# Altium PCB ScannerV2.PcbDoc
Units mm, origin at the board's own origin, x right, y up, seen from the top; angles counter-clockwise.
Board outline 40 x 92 mm, 2 copper layers (Top Layer, Bottom Layer); 63 components, 44 nets, 218 pads, 222 vias.
Unrouted connection lines stored in the file: 22.
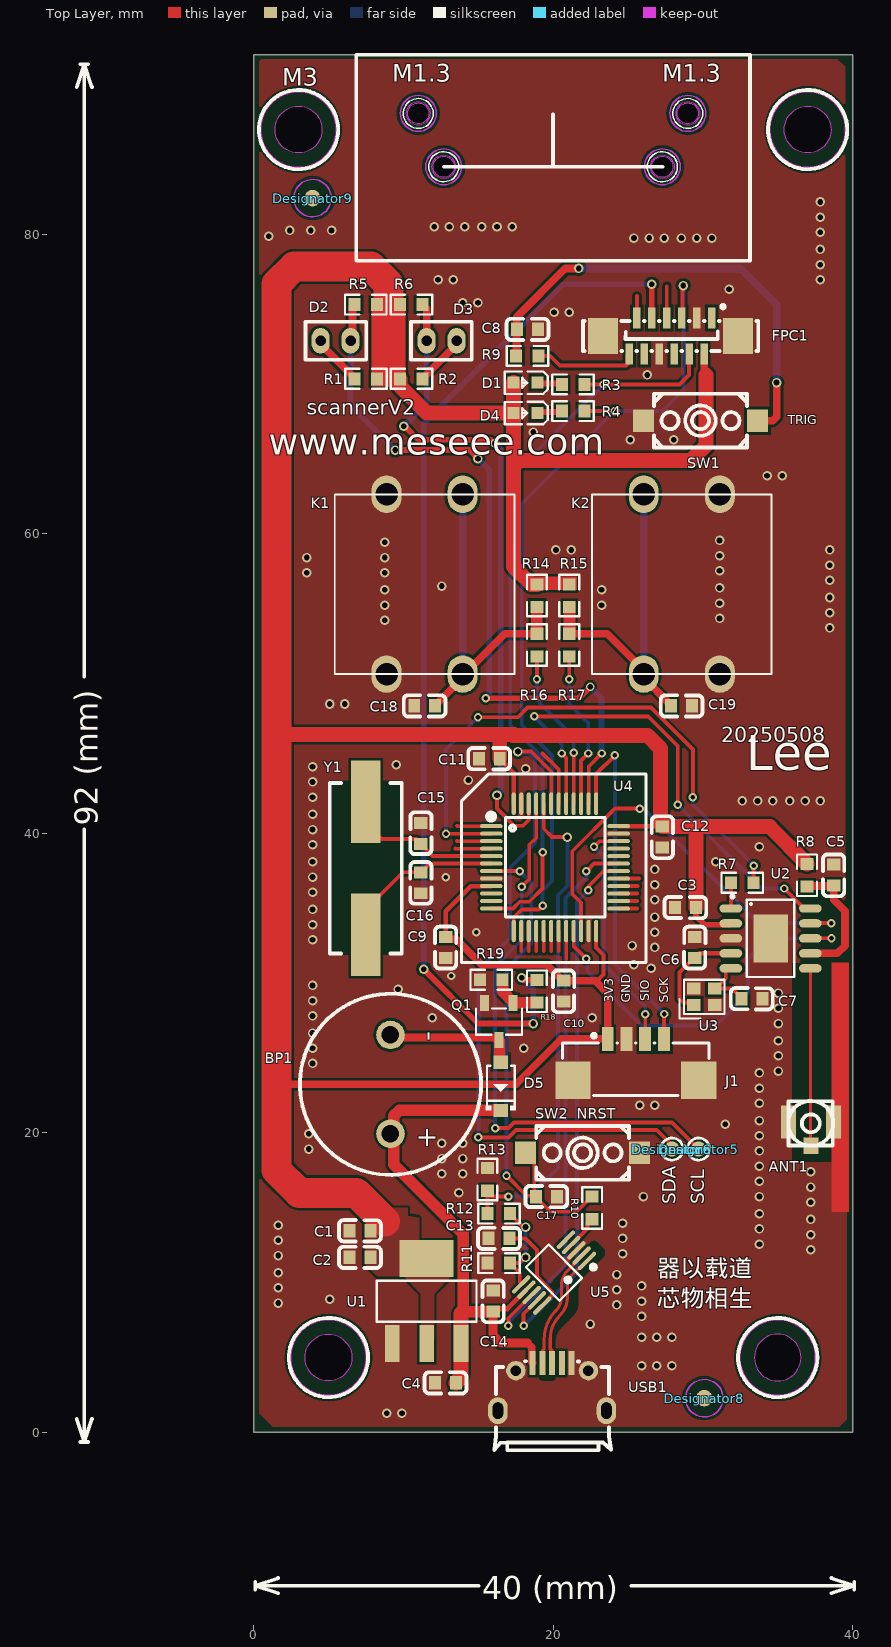
[diagram p0: Top Layer view]
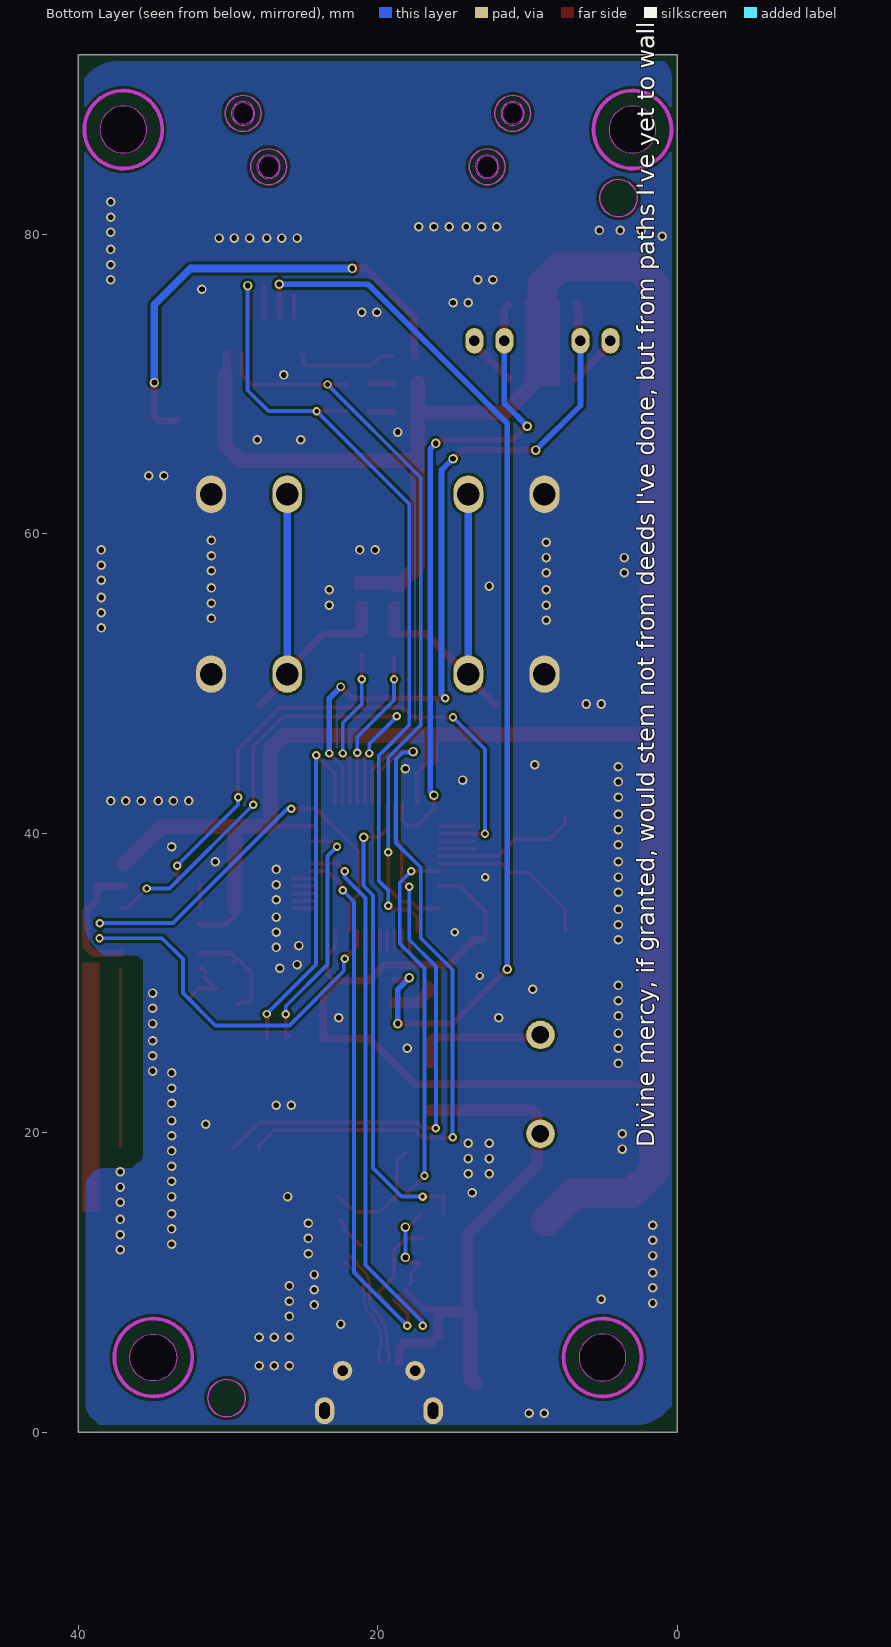
[diagram p1: Bottom Layer view, seen from below]

## Layer stack, top to bottom
Top Solder: solder mask 0.0102, Solder Resist, Dk 3.5
Top Layer: signal copper 0.0356
Dielectric 1: dielectric 0.32, FR-4, Dk 4.8
Bottom Layer: signal copper 0.0356
Bottom Solder: solder mask 0.0102, Solder Resist, Dk 3.5

## Board outline
0,0 0,92 40,92 40,0
cut-out: 33.44,5 ccw(c35,5) 35,3.44 ccw(c35,5) 36.56,5 ccw(c35,5) 35,6.56 ccw(c35,5)
cut-out: 5,3.44 cw(c5,5) 3.44,5 cw(c5,5) 5,6.56 cw(c5,5) 6.56,5 cw(c5,5)
cut-out: 37,85.44 cw(c37,87) 35.44,87 cw(c37,87) 37,88.56 cw(c37,87) 38.56,87 cw(c37,87)
cut-out: 29,87.287 cw(c29,88.077) 28.21,88.077 cw(c29,88.077) 29,88.867 cw(c29,88.077) 29.79,88.077 cw(c29,88.077)
cut-out: 27.3,83.726 cw(c27.3,84.516) 26.51,84.516 cw(c27.3,84.516) 27.3,85.306 cw(c27.3,84.516) 28.09,84.516 cw(c27.3,84.516)
cut-out: 12.7,83.726 cw(c12.7,84.516) 11.91,84.516 cw(c12.7,84.516) 12.7,85.306 cw(c12.7,84.516) 13.49,84.516 cw(c12.7,84.516)
cut-out: 11,87.287 cw(c11,88.077) 10.21,88.077 cw(c11,88.077) 11,88.867 cw(c11,88.077) 11.79,88.077 cw(c11,88.077)
cut-out: 12.7,83.811 cw(c12.7,84.516) 11.995,84.516 cw(c12.7,84.516) 12.7,85.221 cw(c12.7,84.516) 13.405,84.516 cw(c12.7,84.516)
cut-out: 27.3,83.811 cw(c27.3,84.516) 26.595,84.516 cw(c27.3,84.516) 27.3,85.221 cw(c27.3,84.516) 28.005,84.516 cw(c27.3,84.516)
cut-out: 29,87.372 cw(c29,88.077) 28.295,88.077 cw(c29,88.077) 29,88.782 cw(c29,88.077) 29.705,88.077 cw(c29,88.077)
cut-out: 11,87.372 cw(c11,88.077) 10.295,88.077 cw(c11,88.077) 11,88.782 cw(c11,88.077) 11.705,88.077 cw(c11,88.077)
cut-out: 37,85.44 cw(c37,87) 35.44,87 cw(c37,87) 37,88.56 cw(c37,87) 38.56,87 cw(c37,87)
cut-out: 3,85.44 cw(c3,87) 1.44,87 cw(c3,87) 3,88.56 cw(c3,87) 4.56,87 cw(c3,87)
cut-out: 11,88.077

## Design rules (kind name [scope] priority, off if disabled: settings)
Clearance [All] p1: gap=0.178 ignorepadtopadclearanceinfootprint=FALSE
DiffPairsRouting DiffPair_USBDiffPairsRouting [InDifferentialPair ('USB1')] p1: maxlimit=0.254 minlimit=0.152 mostfreqgap=0.203 toplayer_minwidth=0.178 toplayer_maxwidth=0.381 toplayer_prefwidth=0.203 bottomlayer_minwidth=0.178 bottomlayer_maxwidth=0.381 bottomlayer_prefwidth=0.203 maxuncoupledlength=12.7
DiffPairsRouting [All] p2: maxlimit=0.203 minlimit=0.203 mostfreqgap=0.203 toplayer_minwidth=0.178 toplayer_maxwidth=0.254 toplayer_prefwidth=0.178 bottomlayer_minwidth=0.178 bottomlayer_maxwidth=0.254 bottomlayer_prefwidth=0.178 maxuncoupledlength=12.7
MatchedLengths DiffPair_USBMatchedLengths [InDifferentialPair ('USB1')] p1: tolerance=0.254 checknetsindiffpair=FALSE checkdiffpairvsdiffpair=TRUE checkxsignals=TRUE checkothers=TRUE usedelayunits=FALSE
PlaneClearance PlaneClearance_2 [All] p1: clearance=0.508
PlaneClearance PlaneClearance_1 [InNet('UD-')] p2: clearance=1.016
PlaneClearance [InNet('UD+')] p3: clearance=1.016
PlaneConnect [All] p1: planeconnectstyle=Direct reliefexpansion=0.508 reliefentries=4 reliefconductorwidth=0.254 reliefairgap=0.254
PolygonConnect [All] p1: connectstyle=Direct reliefconductorwidth=0.254 reliefentries=4 polygonreliefangle="90 Angle" airgapwidth=0.254
RoutingVias [All] p1: holewidth=0.711 width=1.27 viastyle="Through Hole" minholewidth=0.711 minwidth=1.27 maxholewidth=0.711 maxwidth=1.27
SolderMaskExpansion [All] p1: expansion=0.102
Width [All] p1: maxlimit=3 minlimit=0.19 preferedwidth=0.254 minimp=50.000000 maximp=50.000000 favimp=50.000000
27 further rules are at their usual default settings.

## Classes and differential pairs
component class ScannerV2: ANT1 BP1 C1 C2 C3 C4 C5 C6 C7 C8 C9 C10 C11 C12 C13 C14 C15 C16 C17 C18 C19 D1 D2 D3 D4 D5 FPC1 J1 K1 K2 Q1 R1 R2 R3 R4 R5 R6 R7 R8 R9 R10 R11 R12 R13 R14 R15 R16 R17 R18 R19 SW1 SW2 U1 U2 U3 U4 U5 USB1 Y1

## Components (designator, comment, footprint, x,y, rotation, side; value= is the part's Value field where it differs from the comment)
ANT1 "ANT" IPX-2.0 37.211,19.939 r270 top
BP1 "Beep" BEEP 9.144,23.241 r270 top
C1 "106,0603" C0603 7.112,13.462 r0 top value=104
C2 "104,0603" C0603 7.112,11.684 r0 top value=104
C3 "2.2uF,0603" C0603 28.829,35.052 r180 top value=104
C4 "106,0603" C0603 12.827,3.302 r0 top value=104
C5 "2.2uF,0603" C0603 38.735,37.211 r90 top value=104
C6 "12pF?,0603" C0603 29.464,32.385 r90 top value=104
C7 "12pF?,0603" C0603 33.274,28.956 r0 top value=104
C8 "104,0603" C0603 18.288,73.66 r180 top value=104
C9 "104,0603" C0603 12.827,32.385 r90 top value=104
C10 "104,0603" C0603 20.701,29.464 r90 top value=104
C11 "104,0603" C0603 15.739,44.987 r0 top value=104
C12 "104,0603" C0603 27.305,39.751 r90 top value=104
C13 "104,0603" C0603 16.383,12.954 r180 top value=104
C14 "104,0603" C0603 16.002,8.763 r90 top value=104
C15 "22pF,0603" C0603 11.176,40.005 r270 top value=104
C16 "22pF,0603" C0603 11.176,36.703 r90 top value=104
C17 "104,0603" C0603 19.558,15.748 r0 top value=104
C18 "104,0603" C0603 11.43,48.514 r0 top value=104
C19 "104,0603" C0603 28.575,48.514 r180 top value=104
D1 "LED,0603" LED0603 18.161,70.104 r180 top
D2 "LED" LED-2.5mm 4.477,72.898 r0 top
D3 "LED" LED-2.5mm 13.557,72.898 r180 top
D4 "LED,0603" LED0603 18.161,68.072 r180 top
D5 "1N4148" 1N4148 16.51,23.114 r270 top
Designator5 "Comment" TP_PWR 29.718,18.923 r90 top
Designator6 "Comment" TP_PWR 27.94,18.923 r90 top
Designator8 "Comment" MARK-Point 30.099,2.286 r90 top
Designator9 "Comment" MARK-Point 3.937,82.423 r90 top
FPC1 "AFC01-S12FCA-00" CONN-SMD-12P_AFC11-S12ICA-00 27.847,73.222 r180 top
J1 "Conn_1.25mm_4Pin_PLT" CONN-SMD_4P-P1.25_HCTL_HC-1.25-4PLT 25.527,24.892 r0 top
K1 "TS665CJ" KEY12*12 11.422,56.642 r180 top
K2 "TS665CJ" KEY12*12 28.594,56.642 r0 top
Q1 "S8050" S8050 16.383,27.432 r90 top
R1 "1K,0603" R0603 7.502,70.358 r0 top
R2 "1K,0603" R0603 10.541,70.358 r180 top
R3 "0?,0603" R0603 21.336,69.977 r0 top
R4 "0?,0603" R0603 21.336,68.199 r0 top
R5 "10K,0603" R0603 7.493,75.311 r0 top
R6 "10K,0603" R0603 10.541,75.311 r180 top
R7 "0?,0603" R0603 32.639,36.703 r0 top
R8 "0?,0603" R0603 36.957,37.211 r90 top
R9 "0?,0603" R0603 18.288,71.882 r0 top
R10 "0?,0603" R0603 22.606,14.986 r90 top
R11 "4k7,0603" R0603 16.383,11.303 r180 top
R12 "0?,0603" R0603 16.383,14.605 r0 top
R13 "1K?,0603" R0603 15.621,16.891 r90 top
R14 "10K,0603" R0603 18.923,55.88 r90 top
R15 "10K,0603" R0603 21.082,55.88 r90 top
R16 "100R,0603" R0603 18.923,52.578 r90 top
R17 "100R,0603" R0603 21.082,52.578 r90 top
R18 "1K,0603" R0603 18.923,29.464 r270 top
R19 "10K,0603" R0603 15.875,30.226 r180 top
SW1 "K2-1107ST-A4DW-06" KEY-SMD_L6.2-W3.6-LS8.0 29.845,67.564 r180 top
SW2 "K2-1107ST-A4DW-06" KEY-SMD_L6.2-W3.6-LS8.0 21.971,18.669 r180 top
U1 "AMS1117-3.3" AMS1117 11.557,8.763 r270 top
U2 "CH9141K" CH9141K 34.527,33.109 r270 top
U3 "32MHz" 32MHz_2016 30.099,29.083 r0 top value=32kHz
U4 "STM32F103C8T6" LQFP-48_L7.0-W7.0-P0.50-LS9.0-BL 20.125,37.731 r270 top
U5 "CH340X" CH340X 20.066,10.668 r135 top
USB1 "USB-5PIN" MICRO-USB-SMD_MICROXNJ 19.939,3.048 r0 top
Y1 "8MHz" 8MHz 7.493,37.673 r270 top

## Footprints (in the part's own frame and the unit in brackets; to place one, negate y for a bottom-side part, rotate by r counter-clockwise, add the part's x,y. Pads: shape width x height; smd on the part's side, far side on the other; paste and mask are expansions set on the pad)
1N4148 [mm]
  rect 0.88x0.96 smd: 1(1.61,0) 2(-1.61,0)
  silkscreen extent -1.38,-1 1.6,1
8MHz [mm] "with Master"
  rect 5.5x2 smd: 1(-4.45,0) 2(4.45,0)
  silkscreen extent -5.7,-2.4 5.7,2.4
32MHz_2016 [mm]
  rect 0.9x0.8 smd: 1(-0.7,-0.55) 2(0.7,-0.55) 3(0.7,0.55) 4(-0.7,0.55)
  silkscreen extent -1.65,-1.45 1.35,1.15
AMS1117 [mm] "SOT-223-4_L6.5-W3.5-P2.30-LS7.0-BR"
  rect 2.47x0.98 smd: 1(2.835,-2.3) 2(2.835,0) 3(2.835,2.3)
  rect 2.47x3.6 smd: 4(-2.835,0)
  silkscreen extent -1.37,-3.33 1.37,3.33
BEEP [mm]
  round 1.905 hole 1.168: 1(3.3,0) 2(-3.3,0)
  silkscreen extent -6.05,-6.05 6.05,6.05
C0603 [mm]
  rect 0.8x0.9 smd: 1(-0.7,0) 2(0.7,0)
  silkscreen extent -1.41,-0.71 1.39,0.72
CH340X [mm]
  oval 0.28x1.62 smd: 1(-1,-2.11) 2(-0.5,-2.11) 3(0,-2.11) 4(0.5,-2.11) 5(1,-2.11) 6(1,2.11) 7(0.5,2.11) 8(0,2.11) 9(-0.5,2.11) 10(-1,2.11)
  silkscreen extent -1.74,-2.26 1.58,1.07
CH9141K [mm] "SOP-10"
  oval 0.56x1.515 smd paste+0 mask+0.051: 1(-1.879,-2.65) 2(-0.879,-2.65) 3(0.121,-2.65) 4(1.121,-2.65) 5(2.121,-2.65) 6(2.121,2.65) 7(1.121,2.65) 8(0.121,2.65) 9(-0.879,2.65) 10(-1.879,2.65)
  rect 3.2x2.3 smd paste+0 mask+0.051: 11(0.121,0)
  silkscreen extent -2.77,-2.64 2.7,1.59
CONN-SMD-12P_AFC11-S12ICA-00 [mm]
  rect 0.5x1.4 smd: 1(-2.75,-1.2) 2(-2.25,1.2) 3(-1.75,-1.2) 4(-1.25,1.2) 5(-0.75,-1.2) 6(-0.25,1.2) 7(0.25,-1.2) 8(0.75,1.2) 9(1.25,-1.2) 10(1.75,1.2) 11(2.25,-1.2) 12(2.75,1.2)
  rect 2x2.4 smd: 13(4.5,0) 14(-4.5,0)
  silkscreen extent -5.85,-2.07 5.85,1
CONN-SMD_4P-P1.25_HCTL_HC-1.25-4PLT [mm]
  rect 0.8x1.62 smd paste+0 mask+0.05: 1(-1.875,1.38) 2(-0.625,1.38) 3(0.625,1.38) 4(1.875,1.38)
  rect 2.35x2.5 smd paste+0 mask+0.05: 5(-4.2,-1.38) 6(4.2,-1.38)
  silkscreen extent -4.9,-2.4 4.9,1.73
IPX-2.0 [mm]
  rect 1.1x1 smd: 1(0.8,0)
  rect 2.2x1 smd: 2(-0.8,1.5) 3(-0.8,-1.5)
  silkscreen extent -2.2,-1.5 0.8,1.5
KEY12*12 [mm]
  oval 2x2.5 hole 1.5: 1(-2.54,6) 1(-2.54,-6) 2(2.54,6) 2(2.54,-6)
  silkscreen extent -6,-6 6,6
KEY-SMD_L6.2-W3.6-LS8.0 [mm]
  rect 1.4x1.5 smd: 1(-3.8,0) 2(3.8,0)
  silkscreen extent -3.1,-1.8 3.1,1.8
LED0603 [mm]
  rect 0.8x0.8 smd: 1(0.799,0) 2(-0.799,0)
  silkscreen extent -1.49,-0.75 1.39,0.76
LED-2.5mm [mm]
  oval 1.2x1.7 hole 0.7: 1(0,0) 2(2,0)
  silkscreen extent -1.02,-1.27 3.05,1.27
LQFP-48_L7.0-W7.0-P0.50-LS9.0-BL [mm]
  oval 0.27x1.5 smd paste+0 mask+0.05: 1(-2.75,-4.25) 2(-2.25,-4.25) 3(-1.75,-4.25) 4(-1.25,-4.25) 5(-0.75,-4.25) 6(-0.25,-4.25) 7(0.25,-4.25) 8(0.75,-4.25) 9(1.25,-4.25) 10(1.75,-4.25) 11(2.25,-4.25) 12(2.75,-4.25) 25(2.75,4.25) 26(2.25,4.25) 27(1.75,4.25) 28(1.25,4.25) 29(0.75,4.25) 30(0.25,4.25) 31(-0.25,4.25) 32(-0.75,4.25) 33(-1.25,4.25) 34(-1.75,4.25) 35(-2.25,4.25) 36(-2.75,4.25)
  oval 1.5x0.27 smd paste+0 mask+0.05: 13(4.25,-2.75) 14(4.25,-2.25) 15(4.25,-1.75) 16(4.25,-1.25) 17(4.25,-0.75) 18(4.25,-0.25) 19(4.25,0.25) 20(4.25,0.75) 21(4.25,1.25) 22(4.25,1.75) 23(4.25,2.25) 24(4.25,2.75) 37(-4.25,2.75) 38(-4.25,2.25) 39(-4.25,1.75) 40(-4.25,1.25) 41(-4.25,0.75) 42(-4.25,0.25) 43(-4.25,-0.25) 44(-4.25,-0.75) 45(-4.25,-1.25) 46(-4.25,-1.75) 47(-4.25,-2.25) 48(-4.25,-2.75)
  silkscreen extent -6.22,-6.22 6.35,6.1
MARK-Point [mm]
  round 1.1 smd: 1(0,0)
  Keep-Out Layer circle w0.1: c0,0 r1.25
MICRO-USB-SMD_MICROXNJ [mm] "withPWR"
  rect 0.4x1.6 smd paste-100 mask+0.051: 1(-1.3,1.596) 2(-0.65,1.596) 3(0,1.596) 4(0.65,1.596) 5(1.3,1.596)
  round 1.3 hole 0.7: 6(2.425,1.074) 9(-2.425,1.074)
  oval 1.3x1.8 hole 0.7 slot 1.1 at 90 deg: 7(3.625,-1.596) 8(-3.625,-1.596)
  silkscreen extent -3.87,-4.24 3.93,1.71
R0603 [mm]
  rect 0.806x0.864 smd paste-100 mask+0.051: 1(-0.753,0) 2(0.753,0)
  silkscreen extent -1.39,-0.66 1.39,0.66
S8050 [mm] "NPN"
  rect 1.07x0.6 smd: 1(1.235,-0.95) 2(1.235,0.95) 3(-1.235,0)
  silkscreen extent -0.88,-1.54 0.88,1.54
TP_PWR [mil] "TP_PWR"
  round 40 smd paste+0: 1(0,0)
  silkscreen extent -29,-29 29,29

## Part data
ANT1: library part ANT_IPX
C1 C2 C3 C4 C5 C6 C7 C8 C9 C10 C11 C12 C13 C14 C15 C16 C17 C18 C19: library part Cap2, "105,0603", LatestRevisionDate=17-Jul-2002, LatestRevisionNote="Re-released for DXP Platform.", Published=8-Jun-2000, Publisher="Altium Limited"
D1 D4: library part LED0603
D5: "SOD-123"
FPC1: library part FPC-12Pin_0.5, JLCPCB Part Class="Extended Part", LCSC Part Name="间距:0.5mm P数:12P 翻盖", Manufacturer=JS(钜硕电, Add into BOM=yes, Contact Type=ÏÂ½, Convert to PCB=yes, Datasheet=https://atta.szlcsc.com/upload/public/pdf/source/20190816/C413942_2A72D1AC756EAE17EEDF756A339D4500.pdf, Device=AFC01-S12FCA-00, FFC, FCB Thickness=0.3mm, Height Above Board=2mm, Locking Feature=翻盖, Manufacturer Part=AFC01-S12FCA-00, Mounting Type=ÎÔÌ, Number of Contacts=12P, Pitch=0.5mm, Supplier=LCSC, Supplier Footprint=SMD,P=0.5mm,ÎÔÌ, Supplier Part=C262661, Symbol=AFC01-S12FCA-00
J1: "SWD_Conn"
K1 K2: "矩阵按键"
R1 R2 R3 R4 R5 R6 R7 R8 R9 R10 R11 R12 R13 R14 R15 R16 R17 R18 R19: library part Res2, "0603", LatestRevisionDate=17-Jul-2002, LatestRevisionNote="Re-released for DXP Platform.", Published=8-Jun-2000, Publisher="Altium Limited"
SW1 SW2: Contact Current=50mA, Insulation Resistance=100MΩ, JLCPCB Part Class="Extended Part", LCSC Part Name="轻触开关 3.6*6.1*", Manufacturer=韩国º, Operating Force=250gf, Operating Temperature=-25¡æ~+85¡, Voltage Rating (DC)=12V, Actuator Style=¾ØÐÎ°, Add into BOM=yes, Circuit=µ¥µ¶µ, Convert to PCB=yes, Datasheet=https://atta.szlcsc.com/upload/public/pdf/source/20210810/381712CEF248770C072B585C3485C888.pdf, Device=K2-1107ST-A4DW-06, Manufacturer Part=K2-1107ST-A4DW-06, Mechanical Life=10Íò´, Mounting Style=Á¢Ì, Supplier=LCSC, Supplier Footprint=SMD, Supplier Part=C118141, Switch Height=2.5mm, Switch Length=6.1mm, Switch Width=3.6mm, Symbol=K2-1107ST-A4SW-06, With Lamp=-
U1: library part AMS1117-3.3_C347222, Dropout Voltage=1.3V@(1A), JLCPCB Part Class="Extended Part", LCSC Part Name="输出:3.3V 电流:1A 耐Ñ", Manufacturer=UMW(友台半µ, Maximum Input Voltage=12V, Operating Temperature=-, Output Current=1A, Output Voltage=3.3V, Power Supply Rejection Ratio (PSRR)=60dB@(120Hz), Add into BOM=yes, Convert to PCB=yes, Datasheet=https://atta.szlcsc.com/upload/public/pdf/source/20241218/BAF0263FA2E44BCD8AF41AA4FA04EFAA.pdf, Device=AMS1117-3.3_C347222, Feature=过流保护(O, Manufacturer Part=AMS1117-3.3, Noise=-, Number of Outputs=1, Output Polarity=Õý¼, Output Type=¹Ì¶, standby current=-, Supplier=LCSC, Supplier Footprint=SOT-223, Supplier Part=C347222, Symbol=AMS1117-3.3_C347222
U3: library part 32kHz, External load capacitor=12.5pF, Frequency Stability(Full temperature range)=±20ppm, JLCPCB Part Class="Extended Part", LCSC Part Name="32kHz ±20ppm 12.5pF", Manufacturer=HCI(杭晶, Manufacturer Part=FL26T2-32.000-NTLLLDTL, Operating Temperature=-40¡æ~+85¡, Add into BOM=yes, Convert to PCB=yes, Crystal Type=Ö±²å¾, Datasheet=https://atta.szlcsc.com/upload/public/pdf/source/20220525/8CBD6E13DFF87AD7587DCBCECD93CD4C.pdf, Device=FL26T2-32.000-NTLLLDTL, Normal temperature Frequency Tolerance=±20ppm, Supplier=LCSC, Supplier Footprint=DT-26, Supplier Part=C3013591, Symbol=FL26T2-32.000-NTLLLDTL
U5: JLCPCB Part Class="Extended Part", Manufacturer=WCH(南京沁, Add into BOM=yes, Convert to PCB=yes, Datasheet=https://atta.szlcsc.com/upload/public/pdf/source/20230530/6E401E9554E9F5311886CC8B3F89B62E.pdf, Device=CH340X, LCSC Part Name=CH340X, Manufacturer Part=CH340X, Supplier=LCSC, Supplier Footprint=MSOP-10, Supplier Part=C3035748, Symbol=CH340X
USB1: library part USB-5PIN_PWR, "with_PWR"

## Via types
v1: diameter 0.635, hole 0.381, Top Layer to Bottom Layer, 124 vias
v2: diameter 0.635, hole 0.381, Top Layer to Bottom Layer, tented both sides, 58 vias
v3: diameter 0.559, hole 0.305, Top Layer to Bottom Layer, tented both sides, 34 vias
v4: diameter 0.559, hole 0.305, Top Layer to Bottom Layer, 4 vias
v5: diameter 0.559, hole 0.254, Top Layer to Bottom Layer, tented both sides, 1 vias
v6: diameter 0.559, hole 0.381, Top Layer to Bottom Layer, tented both sides, 1 vias

## Nets (pads, with @x,y where several pads share a name; then routed paths per layer and width w, separated by ;. In a path a pad name is that pad's centre, name@x,y a point inside that pad or via, vN(x,y) a via of type N, cw(c..) or ccw(c..) an arc to the next point about the centre after c; other vN are vias at no path point)
+5V: BP1.1 C4.2 C14.1 D5.1 U1.3 U5.7 USB1.1 | length 37.2
  Top Layer w0.305: 16.946,8.255 U5.7
  Top Layer w0.381: C14.1@16.256,8.255 16.946,8.255
  Top Layer w0.508: 18.287,5.969 18.585,5.671 18.585,4.698 USB1.1
  Top Layer w0.6: C14.1 16.002,6.477 16.51,5.969 18.287,5.969
  Top Layer w0.762: C14.1 13.991,8.063 13.991,13.26 9.363,17.889 9.363,19.722 BP1.1 9.363,20.16 9.363,21.144 9.723,21.504 D5.1
  Top Layer w1.016: C4.2 ccw(c12.73,4.099) 13.857,4.099 U1.3 13.857,7.929
BEEP_FPC: FPC1.9 R18.1 | length 71
  Top Layer w0.381: v2(11.365,30.932) 14.991,27.305 v2(18.669,27.305) ; v2(17.907,30.353) 18.043,30.217 R18.1 ; v2(26.584,76.668) 26.597,76.654 FPC1.9
  Bottom Layer w0.381: v2(11.365,30.932) 11.365,67.372 20.661,76.668 v2(26.584,76.668) ; v2(17.907,30.353) 18.669,29.591 v2(18.669,27.305)
BLE_AT: U2.10 U4.41 | length 32.8
  Top Layer w0.254: v3(18.732,47.816) 26.352,47.816 28.321,45.847 v3(28.321,41.91) ; v3(20.574,45.339) 20.875,45.038 U4.41 ; v3(35.433,36.322) 36.767,34.988 U2.10
  Bottom Layer w0.254: v3(18.732,47.816) 20.574,45.974 v3(20.574,45.339) ; v3(28.321,41.91) 33.909,36.322 v3(35.433,36.322)
BLE_SLEEP: R7.2 U4.2 | length 38.1
  Top Layer w0.254: v3@12.827,40.005 v3(12.851,39.981) U4.2 ; v3(14.986,47.752) 17.653,47.752 18.301,48.4 26.53,48.4 29.337,45.593 v3(29.337,42.418) ; R7.2 33.392,37.837 v3(33.401,37.846)
  Bottom Layer w0.254: v3(12.851,39.981) 12.851,45.617 v3(14.986,47.752) ; v3(29.337,42.418) 29.337,41.91 v3(33.401,37.846)
Boot0: R12.1 R13.1 U4.44 | length 32.4
  Top Layer w0.254: R13.1@15.621,15.884 15.63,15.875 R12.1 ; R13.1@15.875,15.748 v5(17.018,15.748) ; U4.44 19.375,40.315 19.939,39.751 v2(20.955,39.751)
  Bottom Layer w0.254: v5(17.018,15.748) 18.415,15.748 20.32,17.653 20.32,35.874 20.955,36.509 v2(20.955,39.751)
GND: ANT1.2 ANT1.3 C1.1 C2.1 C3.2 C4.1 C5.2 C6.2 C7.2 C8.1 C9.1 C10.1 C11.1 C12.1 C13.2 C14.2 C15.1 C16.1 C17.2 C18.1 C19.1 FPC1.3 FPC1.8 FPC1.13 FPC1.14 J1.2 J1.5 J1.6 K1.2 K2.2 Q1.2 R11.2 R13.2 R19.2 SW1.2 SW2.1 U1.1 U2.3 U2.11 U3.2 U3.4 U4.8 U4.23 U4.35 U4.47 U5.3 USB1.5 USB1.6 USB1.7 USB1.8 USB1.9
  other v1: 8.89,1.27 9.906,1.27 25.908,4.445 26.924,4.445 27.94,4.445 25.908,6.35 26.924,6.35 27.94,6.35 22.479,7.239 25.908,7.747 24.257,8.509 1.651,8.636 25.908,8.763 24.257,9.525 1.651,9.652 25.908,9.779 24.257,10.541 1.651,10.668 1.651,11.811 24.638,11.938 37.211,12.192 1.651,12.827 24.638,12.954 37.211,13.208 1.651,13.843 24.638,13.97 37.211,14.224 37.211,15.367 26.035,15.748 37.211,16.383 13.97,17.272 37.211,17.399 13.97,18.288 3.683,18.923 3.683,19.939 31.496,20.574 33.782,20.828 25.781,21.844 26.797,21.844 33.782,21.971 33.782,22.987 33.782,24.003 35.052,24.13 35.052,25.146 18.034,25.654 35.052,26.162 35.052,27.305 22.606,27.686 3.937,27.813 35.052,28.321 3.937,28.829 35.052,29.337 9.652,29.591 3.937,29.845 26.543,30.988 25.4,31.242 26.797,32.385 3.937,32.893 26.797,33.401 3.937,33.909 26.797,34.417 3.937,34.925 26.797,35.56 3.937,36.068 26.797,36.576 3.937,37.084 26.797,37.592 3.937,38.1 33.782,39.116 3.937,39.243 3.937,40.259 3.937,41.275 32.639,42.164 33.655,42.164 34.671,42.164 35.814,42.164 36.83,42.164 37.846,42.164 3.937,42.418 3.937,43.434 18.161,44.323 3.937,44.45 9.525,44.577 5.08,48.641 6.096,48.641 38.481,53.721 8.763,54.229 31.115,54.356 38.481,54.737 8.763,55.245 23.241,55.245 31.115,55.372 38.481,55.753 8.763,56.261 23.241,56.261 31.115,56.388 12.573,56.515 38.481,56.896 8.763,57.404 31.115,57.531 38.481,57.912 8.763,58.42 31.115,58.547 20.193,58.928 21.209,58.928 38.481,58.928 8.763,59.436 31.115,59.563 34.29,63.881 35.306,63.881 20.066,74.803 21.082,74.803 13.97,75.438 14.986,75.438 12.319,76.962 13.335,76.962 37.846,76.962 37.846,77.978 37.846,78.994 1.016,79.883 37.846,80.137 37.846,81.153 37.846,82.169
  other v2: 5.08,8.89 33.782,12.573 33.782,13.589 33.782,14.605 33.782,15.748 13.716,16.002 33.782,16.764 12.573,17.272 33.782,17.78 12.573,18.288 33.782,18.796 12.573,19.304 13.97,19.304 33.782,19.812 3.937,24.638 3.937,25.654 3.937,26.67 11.938,27.686 25.273,32.512 30.861,38.1 14.351,43.561 3.556,57.404 3.556,58.42 25.146,66.294 28.067,66.294 18.669,66.802 26.289,70.612 31.75,76.327 25.4,79.756 26.416,79.756 27.432,79.756 28.575,79.756 29.591,79.756 30.607,79.756 2.413,80.264 3.81,80.264 5.207,80.264 12.065,80.518 13.081,80.518 14.097,80.518 15.24,80.518 16.256,80.518 17.272,80.518
  other v3: 14.859,33.401
  other v4: 13.208,30.48 12.827,37.084
IIC_SCL: Designator5.1 U4.45 | length 37.3
  Top Layer w0.254: v3(16.129,20.32) 17.018,20.32 17.399,20.701 27.94,20.701 Designator5.1 ; v3(17.907,36.449) 18.415,36.957 18.415,39.243 18.875,39.703 U4.45
  Bottom Layer w0.254: v3(16.129,20.32) 16.129,31.115 17.907,32.893 v3(17.907,36.449)
IIC_SDA: Designator6.1 U4.43 | length 46.7
  Top Layer w0.254: v3(15.015,19.698) 17.031,19.698 17.526,20.193 26.924,20.193 27.94,19.177 Designator6.1 ; v2(17.653,45.466) 18.542,45.466 19.875,44.133 U4.43
  Bottom Layer w0.254: v3@15.015,19.939 15.015,30.89 17.145,33.02 17.145,37.719 18.796,39.37 18.796,44.958 18.351,45.402 17.716,45.402 v2(17.653,45.466)
NetANT1_1: ANT1.1 U2.6 | length 11.9
  Top Layer w0.203: U2.6 37.177,19.159 ANT1.1@37.235,19.101
NetBP1_2: BP1.2 D5.2 Q1.3 | length 9
  Top Layer w0.508: BP1.2 9.316,26.369 16.337,26.369 16.383,26.323 Q1.3
  Top Layer w0.762: Q1.3 16.447,26.133 16.447,24.783 16.506,24.724 D5.2
NetC5_1: C5.1 R8.1 U2.7 | length 8.7
  Top Layer w0.508: R8.1 36.984,36.484 38.708,36.484 C5.1 38.735,35.56 39.497,34.798 39.497,32.512 38.973,31.988 U2.7
NetC6_1: C6.1 U2.4 U3.1 | length 6.9
  Top Layer w0.254: U3.1 29.23,28.702 28.702,28.702 28.448,28.956 28.448,30.719 29.414,31.685 C6.1
  Top Layer w0.305: C6.1 29.767,31.988 U2.4 ; C6.1@29.585,31.431 C6.1@29.641,31.431
NetC7_1: C7.1 U2.5 U3.3 | length 4
  Top Layer w0.254: U3.3 U3.3@30.849,29.633 ; U2.5 31.668,30.988 31.526,30.847 31.526,30.31 U3.3@30.849,29.633 ; C7.1 32.574,29.006 31.947,29.633 U3.3@30.849,29.633
NetC8_2: C8.2 R9.1 SW1.1 | length 31.2
  Top Layer w0.508: R9.1 17.561,71.909 17.561,73.633 C8.2 17.588,74.484 20.828,77.724 v2(21.717,77.724) ; SW1.1@33.391,67.691 SW1.1@33.395,67.695 ; SW1.1 34.671,67.564 34.925,67.818 v1(34.925,70.104)
  Bottom Layer w0.508: v2(21.717,77.724) 32.512,77.724 34.925,75.311 v1(34.925,70.104)
NetC13_1: C13.1 U5.10 | length 6.6
  Top Layer w0.254: C13.1 18.161,12.954 18.923,12.192 18.923,10.414 19.939,9.398 19.939,9.134 19.281,8.476 U5.10
NetC18_2: C18.2 K1.1 R14.1 R16.2 | length 21
  Top Layer w0.508: C18.2 12.13,48.564 13.962,50.396 13.962,50.642 14.066,50.642 16.764,53.34 18.914,53.34 R16.2
  Bottom Layer w0.508: K1.1@13.962,50.642 K1.1@13.962,62.642
NetC19_2: C19.2 K2.1 R15.1 R17.2 | length 21.1
  Top Layer w0.508: R17.2 23.615,53.331 26.054,50.892 26.054,50.642 26.054,50.385 27.875,48.564 C19.2
  Bottom Layer w0.508: K2.1@26.054,50.642 K2.1@26.054,62.642
NetD1_2: D1.2 R3.1 | length 1.7
  Top Layer w0.381: D1.2 19.024,70.04 20.519,70.04 R3.1
NetD2_1: D2.1 R1.1 | length 3.5
  Top Layer w0.508: D2.1 4.477,72.658 6.748,70.387 R1.1
NetD3_1: D3.1 R2.1 | length 3.5
  Top Layer w0.508: R2.1 11.294,70.387 13.557,72.649 D3.1
NetD4_2: D4.2 R4.1 | length 1.7
  Top Layer w0.381: D4.2 19.024,68.135 20.519,68.135 R4.1
NetFPC1_12: FPC1.12 R9.2 | length 7
  Top Layer w0.254: R9.2 19.812,71.882 20.447,71.247 24.892,71.247 24.974,71.329 24.974,71.899 FPC1.12
NetQ1_1: Q1.1 R18.2 R19.1 | length 3
  Top Layer w0.762: 16.637,29.727 16.637,29.436 17.333,28.74 Q1.1 17.355,28.689 18.901,28.689 R18.2
NetR7_1: R7.1 U2.1 | length 1.7
  Top Layer w0.254: U2.1 31.877,36.694 R7.1
NetR10_1: R10.1 U5.4 | length 2.3
  Top Layer w0.254: U5.4 22.301,13.61 22.301,13.956 22.577,14.233 R10.1
NetR11_1: R11.1 R12.2 U5.6 | length 6.4
  Top Layer w0.254: R12.2 17.136,14.576 17.997,13.716 v2(18.161,13.716) ; U5.6 17.893,9.909 17.893,9.926 17.772,10.047 17.772,10.639 17.136,11.274 R11.1 17.78,11.303 v2(18.161,11.684)
  Bottom Layer w0.254: v2(18.161,11.684) v2(18.161,13.716)
NRST: C17.1 R10.2 SW2.2 U4.7 | length 33.7
  Top Layer w0.254: U4.7 v3(17.764,37.481) ; v3(16.891,17.145) 18.236,15.8 C17.1@18.744,15.8 ; SW2.2 18.744,18.096 C17.1@18.744,15.8 ; C17.1@18.801,15.489 18.801,15.743 C17.1@18.744,15.8 ; C17.1 18.858,15.698 19.824,14.732 21.57,14.732 22.577,15.739 R10.2
  Bottom Layer w0.254: v3(16.891,17.145) 16.891,30.988 18.542,32.639 18.542,36.703 v3(17.764,37.481)
OSCIN: C15.2 U4.5 Y1.1 | length 9.7
  Top Layer w0.254: Y1.1@7.493,41.021 7.493,40.673 8.542,39.624 10.857,39.624 C15.2 ; C15.2@11.145,39.274 11.938,38.481 U4.5
OSCOUT: C16.2 U4.6 Y1.2 | length 11
  Top Layer w0.254: Y1.2@7.493,33.523 7.493,34.925 9.971,37.403 C16.2 11.754,37.981 U4.6
RX_FPC: FPC1.4 R3.2 U4.12 | length 49.8
  Top Layer w0.254: U4.12 17.328,34.981 17.78,35.433 18.415,35.433 19.304,36.322 v3(19.304,38.735) ; R3.2 v3(23.368,69.977) 28.448,69.977 29.083,70.612 29.083,72.008 FPC1.4
  Bottom Layer w0.254: v3(19.304,38.735) 19.304,45.085 17.145,47.244 17.145,63.754 v3(23.368,69.977)
State_LED1: D2.2 R5.1 U4.38 | length 49
  Top Layer w0.254: U4.38 22.378,41.984 22.378,44.476 v3(23.241,45.339)
  Top Layer w0.381: v2(9.461,65.596) 14.414,65.596 v2(14.986,65.024) ; v3(15.494,49.022) 21.717,49.022 v6(22.479,49.784)
  Top Layer w0.508: D2.2 6.608,73.029 6.608,75.18 R5.1
  Bottom Layer w0.305: v3(15.494,49.022) 15.748,49.276
  Bottom Layer w0.381: D2.2 6.477,68.58 v2(9.461,65.596) ; v2(14.986,65.024) 15.748,64.262 15.748,49.276 ; v6(22.479,49.784) 23.241,49.022 v3(23.241,45.339)
State_LED2: D3.2 R6.1 U4.46 | length 43.9
  Top Layer w0.254: v2(16.256,42.545) 16.256,41.656 17.399,40.513 17.987,40.513 18.375,40.901 U4.46
  Top Layer w0.381: v2(10.033,67.183) 10.102,67.183 10.991,66.294 15.806,66.294 16.06,66.04 v2(16.129,66.04)
  Top Layer w0.508: R6.1 11.294,75.282 11.557,75.02 D3.2
  Bottom Layer w0.381: v2(10.033,67.183) 11.557,68.707 D3.2 ; v2(16.129,66.04) 16.51,65.659 16.51,42.799 v2(16.256,42.545)
SWCLK: J1.4 U4.37 | length 24.1
  Top Layer w0.254: U4.37 22.875,43.957 v3(24.13,45.212) ; J1.4 27.402,27.91 v3(27.432,27.94)
  Bottom Layer w0.254: v3(24.13,45.212) 24.13,31.242 v3(27.432,27.94)
SWIO: J1.3 U4.34 | length 16.4
  Top Layer w0.254: v3(22.733,39.116) 23.098,39.481 U4.34 ; J1.3@25.908,26.516 J1.3 26.152,27.93 v3(26.157,27.935) v3@26.162,27.94
  Bottom Layer w0.254: v3(22.733,39.116) 23.368,38.481 23.368,31.242 26.157,28.453 v3(26.157,27.935)
switch_key: R16.1 U4.40 | length 10.9
  Top Layer w0.254: v3(18.923,50.292) R16.1 ; U4.40 v3(21.375,45.378)
  Bottom Layer w0.254: v3(18.923,50.292) 18.923,48.895 21.375,46.443 v3(21.375,45.378)
TRIG_key: R17.1 U4.39 | length 10.6
  Top Layer w0.254: v3(21.082,50.292) R17.1 ; U4.39 21.875,44.862 v3(22.352,45.339)
  Top Layer w0.381: R17.1@21.053,51.825 R17.1
  Bottom Layer w0.254: v3(21.082,50.292) 21.082,48.641 22.352,47.371 v3(22.352,45.339)
TX_FPC: FPC1.5 R4.2 U4.13 | length 56.5
  Top Layer w0.254: U4.13 17.378,33.484 17.378,34.396 17.907,34.925 19.05,34.925 v3(19.304,35.179) ; R4.2 v3(24.099,68.199) 24.384,68.199 ; FPC1.5 28.649,74.475 28.649,76.528 v2(28.702,76.581)
  Bottom Layer w0.254: v3(19.304,35.179) 19.304,36.195 19.939,36.83 19.939,45.212 17.907,47.244 17.907,62.007 v3(24.099,68.199) 27.305,68.199 28.702,69.596 v2(28.702,76.581)
UD+: U5.1 USB1.3 | length 8
  Top Layer w0.203: USB1.3@19.845,4.871 ccw(c20.165,4.871) USB1.3 19.939,5.424 ccw(c19.817,5.424) 19.817,5.546 19.812,5.551 19.812,6.227 cw(c22.094,6.227) 20.48,7.841 20.483,7.844 ccw(c19.344,8.982) 20.955,8.982 20.955,9.675 cw(c22.244,9.675) 21.333,10.587 21.687,10.941 cw(c21.743,10.884) 21.743,10.964 ccw(c21.743,11.044) 21.8,10.988 U5.1
UD-: U5.2 USB1.2 | length 8
  Top Layer w0.203: USB1.2 19.289,5.429 cw(c19.406,5.429) 19.406,5.546 19.406,5.842 19.406,6.227 19.406,6.23 cw(c22.088,6.23) 20.191,8.126 20.193,8.128 ccw(c19.335,8.986) 20.549,8.986 20.549,9.759 cw(c22.041,9.759) 20.986,10.815 21.4,11.228 ccw(c21.343,11.285) 21.423,11.285 cw(c21.503,11.285) 21.446,11.341 U5.2
USART1_RX: U4.31 U5.8 | length 37.6
  Top Layer w0.254: v3(17.018,7.112) 17.018,7.62 U5.8 ; v3(22.225,37.465) 22.741,37.981 U4.31
  Bottom Layer w0.254: v3(17.018,7.112) 17.018,7.366 20.828,11.176 20.828,35.687 22.225,37.084 v3(22.225,37.465)
USART1_TX: U4.30 U5.9 | length 35.7
  Top Layer w0.254: v3(18.034,7.112) 18.034,7.929 U5.9 ; v3(22.352,36.195) 22.352,36.444 23.389,37.481 U4.30
  Bottom Layer w0.254: v3(18.034,7.112) 21.59,10.668 21.59,35.433 v3(22.352,36.195)
USART3_RX: U2.9 U4.22 | length 28.6
  Top Layer w0.254: U4.22 21.875,35.37 21.285,35.959 21.285,38.811 24.13,41.656 v3(25.781,41.656) ; U2.9 37.201,34.012 v4(38.584,34.012)
  Bottom Layer w0.254: v3(25.781,41.656) 26.035,41.656 33.679,34.012 v4(38.584,34.012)
USART3_TX: U2.8 U4.21 | length 26
  Top Layer w0.254: U4.21 21.375,32.473 v3(22.225,31.623) ; U2.8 37.193,33.004 v4(38.592,33.004)
  Bottom Layer w0.254: v3(22.225,31.623) 22.283,31.565 22.283,30.803 25.908,27.178 30.861,27.178 33.02,29.337 33.02,31.607 34.417,33.004 v4(38.592,33.004)
VDD: C1.2 C2.2 C3.1 C9.2 C10.2 C11.2 C12.2 D1.1 D4.1 FPC1.2 J1.1 R1.2 R2.2 R5.2 R6.2 R8.2 R14.2 R15.2 U1.2 U1.4 U2.2 U4.9 U4.24 U4.36 U4.48 | length 227.2
  Top Layer w0.254: 22.875,30.084 23.368,30.577 23.368,31.877 22.875,32.37 U4.24
  Top Layer w0.3: C9.2@12.977,32.935 C9.2 12.827,34.798 14.51,36.481 U4.9 ; C11.2 17.36,44.066 17.36,41.996 U4.48 ; 22.875,30.084 22.875,30.164 ; U4.36 24.39,40.466 27.29,40.466 C12.2
  Top Layer w0.381: C3.1 29.529,34.494 30.114,33.909 31.798,33.909 U2.2
  Top Layer w0.5: 1.524,23.241 17.526,23.241 20.557,26.272 J1.1 23.652,29.307 22.875,30.084 ; C9.2@12.977,32.935 13.547,32.935 15.24,31.242 19.573,31.242 20.651,30.164 C10.2 22.875,30.164 ; FPC1.2 30.097,70.741 30.226,70.612
  Top Layer w1: 1.524,46.609 16.51,46.609 ; 7.845,77.851 8.099,77.597 ; R2.2 9.788,69.841 11.557,68.072 D4.1 ; C11.2 16.439,46.538 16.51,46.609 ; 17.337,46.547 26.299,46.547 27.178,45.668 C12.2@27.178,40.64 ; D1.1 D4.1 ; 17.399,46.609 16.51,46.609 ; R14.2 18.551,56.633 17.362,57.822 17.362,64.516 ; C12.2 29.591,40.451 ; C3.1 29.529,40.389 29.591,40.451 ; 30.226,70.612 30.226,65.913 29.21,64.897 17.743,64.897 17.362,64.516 ; R8.2 34.47,40.451 29.591,40.451 ; 17.362,64.516 D4.1
  Top Layer w2: 7.845,77.851 2.696,77.851 1.524,76.679 1.524,46.609 1.524,23.241 1.524,17.526 3.048,16.002 6.858,16.002 8.763,14.097 ; 8.099,77.597 9.017,76.679 9.017,75.057
pads on no net: Designator8.1 Designator9.1 FPC1.1 FPC1.6 FPC1.7 FPC1.10 FPC1.11 U4.1 U4.3 U4.4 U4.10 U4.11 U4.14 U4.15 U4.16 U4.17 U4.18 U4.19 U4.20 U4.25 U4.26 U4.27 U4.28 U4.29 U4.32 U4.33 U4.42 U5.5 USB1.4
copper on no net: | length 30.7
  Top Layer w0.254: 13.462,38.989 13.47,38.981 15.875,38.981 ; 13.589,39.497 13.605,39.481 15.875,39.481 ; 13.589,40.513 13.621,40.481 15.875,40.481 ; 17.875,32.131 17.875,33.481 ; 18.375,32.131 18.375,33.481 ; 18.875,32.131 18.875,33.481 ; 19.304,45.339 20.375,44.268 20.375,41.981 ; 19.375,32.131 19.375,33.481 ; 19.875,32.131 19.875,33.481 ; 20.375,32.131 20.375,33.481 ; 20.875,31.623 20.875,33.481 ; 24.375,34.981 25.598,34.981 ; 24.375,35.481 25.606,35.481 ; 24.375,35.981 25.614,35.981 ; 24.375,36.481 25.654,36.481 ; 24.375,36.981 25.757,36.981 ; 25.597,74.422 25.597,75.889 ; 27.597,74.422 27.597,76.543

## Polygon pours and split planes (outlines as drawn)
GND on Top Layer "Top Layer-GND" (solid, remove dead copper, pour order 40): 0.508,91.694 38.989,91.694 39.497,91.186 39.497,32.258 38.608,31.369 35.941,31.369 35.941,18.034 38.735,18.034 39.624,17.145 39.624,0.889 39.116,0.381 1.27,0.381 0.381,1.27 0.381,91.567
VDD on Top Layer "VDD_L01_P005" (solid, pour order 5): 7.493,11.176 8.255,10.414 10.033,10.414 11.176,9.271 11.176,6.309 11.557,5.928 11.725,6.096 11.938,6.096 12.065,6.223 12.065,9.271 13.208,10.414 13.208,12.7 10.16,12.7 9.017,13.843 7.493,13.843
VDD on Top Layer "VDD_L01_P006" (solid, pour order 6): 7.493,13.716 8.636,12.573 11.049,12.573 11.049,14.351 10.287,14.478 10.287,14.986 7.62,14.986 7.493,14.859
no net on Top Layer "NONET_L01_P000" (solid, pour order 0): 18.415,4.953
GND on Bottom Layer "Bottom Layer-GND" (solid, remove dead copper, pour order 42): 0.889,91.567 37.429,91.567 cw(c37.429,89.027) 39.225,90.823 39.624,90.424 39.624,34.199 cw(c37.084,34.199) 38.88,32.403 38.354,31.877 36.322,31.877 ccw(c36.322,31.264) 35.888,31.697 35.687,31.496 35.687,18.446 ccw(c36.311,18.547) 35.894,18.072 cw(c35.627,17.287) 36.37,17.653 38.354,17.653 cw(c38.354,16.733) 39.004,17.384 39.497,16.764 ccw(c39.867,16.611) 39.497,16.457 39.497,1.778 cw(c38.577,1.778) 39.228,1.128 38.608,0.508 2.703,0.508 cw(c2.703,3.048) 0.907,1.252 0.381,1.778 0.381,90.424 cw(c1.914,90.424) 0.83,91.508
no net on Bottom Layer "Bottom Layer-No Net 2" (solid, pour order 32): 9.906,36.957
no net on Bottom Layer "Bottom Layer-No Net 1" (solid, pour order 30): 10.16,36.83
no net on Bottom Layer "Bottom Layer-No Net" (solid, pour order 14): 17.78,13.97

## Keep-outs
Keep-Out Layer:
  circle w0.1: c27.3,84.516 r1.2
  circle w0.1: c12.7,84.516 r1.2
  circle w0.1: c29,88.077 r1.2
  circle w0.1: c11,88.077 r1.2
  circle w0.254: c5,5 r2.6
  circle w0.254: c35,5 r2.6
  circle w0.254: c37,87 r2.6
  circle w0.254: c3,87 r2.6
  pour cut-out: 5,3.44 cw(c5,5) 3.44,5 cw(c5,5) 5,6.56 cw(c5,5) 6.56,5 cw(c5,5)

## Other copper
Top Layer:
  rectangle net GND: 38.608,14.732 39.751,31.369
  rectangle net VDD: 7.874,69.85 10.16,75.692
  rectangle net VDD: 18.288,56.261 21.59,57.15
  rectangle net NetC19_2: 20.701,53.331 21.482,55.499
  rectangle net NetC18_2: 18.542,53.213 19.304,55.499
  pour cut-out: 19.05,6.849 cw(c21.218,6.849) 19.685,8.382 19.924,8.621 ccw(c19.273,9.271) 20.193,9.271 20.193,9.345 ccw(c19.759,9.345) 20.066,9.652 cw(c20.373,9.959) 19.939,9.959 19.939,10.033 cw(c20.246,10.033) 20.029,10.25 22.516,12.737 cw(c22.733,12.52) 22.733,12.827 cw(c22.733,12.52) 22.95,12.737 23.368,12.319 cw(c23.061,12.012) 23.495,12.012 23.495,11.938 cw(c23.188,11.938) 23.405,11.721 22.166,10.482 ccw(c23.25,9.398) 21.717,9.398 21.717,8.667 cw(c20.416,8.667) 21.336,7.747 20.552,6.963 ccw(c21.419,6.096) 20.193,6.096 20.193,3.556 cw(c19.886,3.863) 19.886,3.429 19.357,3.429 cw(c19.357,3.863) 19.05,3.556
  pour cut-out: 5.08,43.561 5.08,31.877 9.906,31.877 9.906,43.434 9.779,43.561
  pour cut-out: 5.08,43.561
  region: 18.923,51.778
  pour cut-out: 35.941,31.369 38.608,31.369 38.608,18.034 35.941,18.034

## Silkscreen, mask and mechanical layers (free items; w line width, h text height)
Top Overlay:
  circle w0.1: c27.3,84.516 r1
  circle w0.1: c12.7,84.516 r1
  circle w0.1: c11,88.077 r1
  circle w0.1: c29,88.077 r1
  circle w0.254: c5,5 r2.65
  circle w0.254: c35,5 r2.65
  circle w0.254: c37,87 r2.65
  circle w0.254: c3,87 r2.65
  pour cut-out: 35.179,28.829
  lines w0.25: 12.7,84.516 20,84.516 ; 20,88.016 20,84.516 ; 27.3,84.516 20,84.516 ; 6.85,78.232 33.15,78.232 33.15,92 20,92 6.85,92 6.85,78.232
  lines w0.254: -11.811,0.887 -11.303,-0.637 ; -11.811,89.839 -11.303,91.363 ; -11.557,-0.637 -11.049,-0.637 ; -11.557,91.363 -11.049,91.363 ; -11.303,40.259 -11.303,-0.637 ; -11.303,50.467 -11.303,91.363 ; -10.795,0.887 -11.303,-0.637 ; -10.795,89.839 -11.303,91.363 ; 0.115,-10.49 0.115,-9.982 ; 1.639,-10.744 0.115,-10.236 ; 1.639,-9.728 0.115,-10.236 ; 15.011,-10.236 0.115,-10.236 ; 25.219,-10.236 40.115,-10.236 ; 38.591,-10.744 40.115,-10.236 ; 38.591,-9.728 40.115,-10.236 ; 40.115,-10.49 40.115,-9.982
  text "M1.3" at 9.271,89.789 h2
  text "M1.3" at 27.305,89.789 h2
  text "M3" at 1.905,89.535 h2
  text "scannerV2" at 3.556,67.945 h1
  text "TRIG" at 35.687,67.31 h0.6
  text "www.meseee.com" at 1.016,65.278 h1.78
  text "20250508" at 31.242,46.101 h1
  text "Lee" at 32.893,43.434 h4
  text "92 (mm)" at -10.389,40.513 h1.52 r90
  text "SIO" at 26.416,28.802 h0.6 r90
  text "3V3" at 24.003,28.702 h0.6 r90
  text "GND" at 25.146,28.702 h0.6 r90
  text "SCK" at 27.686,28.702 h0.6 r90
  text "NRST" at 21.59,20.955 h0.7
  text "SDA" at 28.194,15.24 h0.9 r90
  text "SCL" at 30.099,15.24 h0.9 r90
  text "器以载道 / 芯物相生" at 26.924,8.001 h2
  text "40 (mm)" at 15.265,-11.151 h1.52
Bottom Overlay:
  text "Divine mercy, if granted, would stem not from deeds I've done, but from paths I've yet to walk." at 1.143,19.05 h2 r270
Mechanical 1:
  circle w0.1: c27.3,84.516 r0.79
  circle w0.1: c12.7,84.516 r0.79
  circle w0.1: c11,88.077 r0.79
  circle w0.1: c29,88.077 r0.79
  circle w0.254: c37,87 r1.56
  circle w0.254: c3,87 r1.56
  circle w0.254: c35,5 r1.56
  circle w0.254: c5,5 r1.56
  pour cut-out: 11,87.287 cw(c11,88.077) 10.21,88.077 cw(c11,88.077) 11,88.867 cw(c11,88.077) 11.79,88.077 cw(c11,88.077)
  pour cut-out: 11,88.077
  pour cut-out: 11,88.077
  lines w0.25: 0,0 0,92 40,92 40,0 0,0

## Text inside footprints (layer, text, board x,y; h text height)
BP1: Top Overlay "+" at 10.558,20.447 h2.29 r270; Top Overlay "-" at 10.736,26.797 h2.29 r270